# EAGLE board LPC1114 -- Valdez Mutant v.04 (EAGLE 7.0.0)
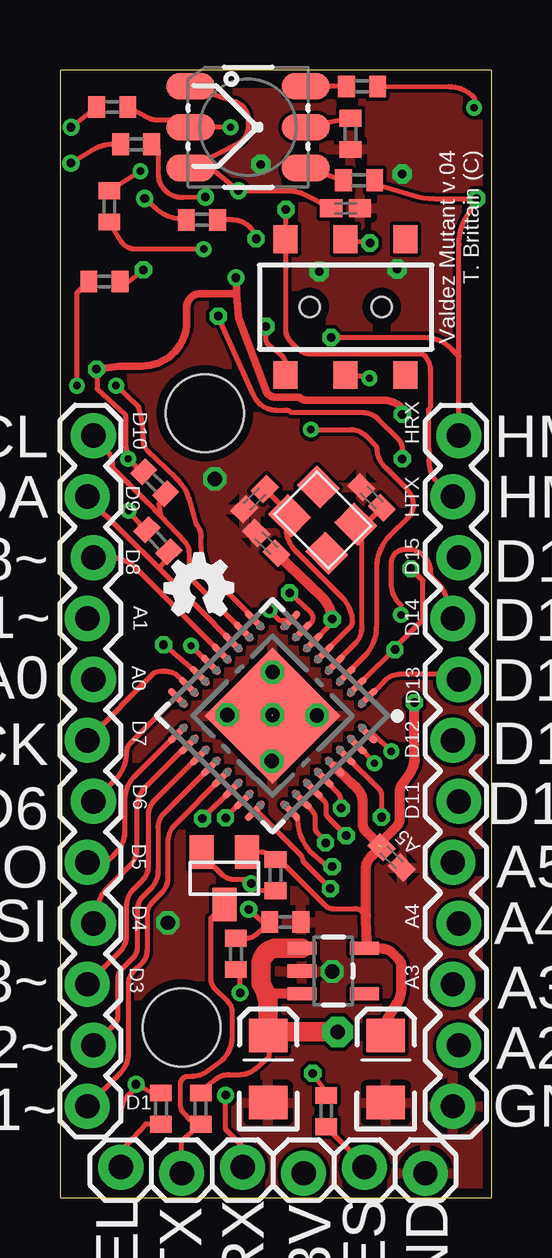
[diagram p0: board, top side]
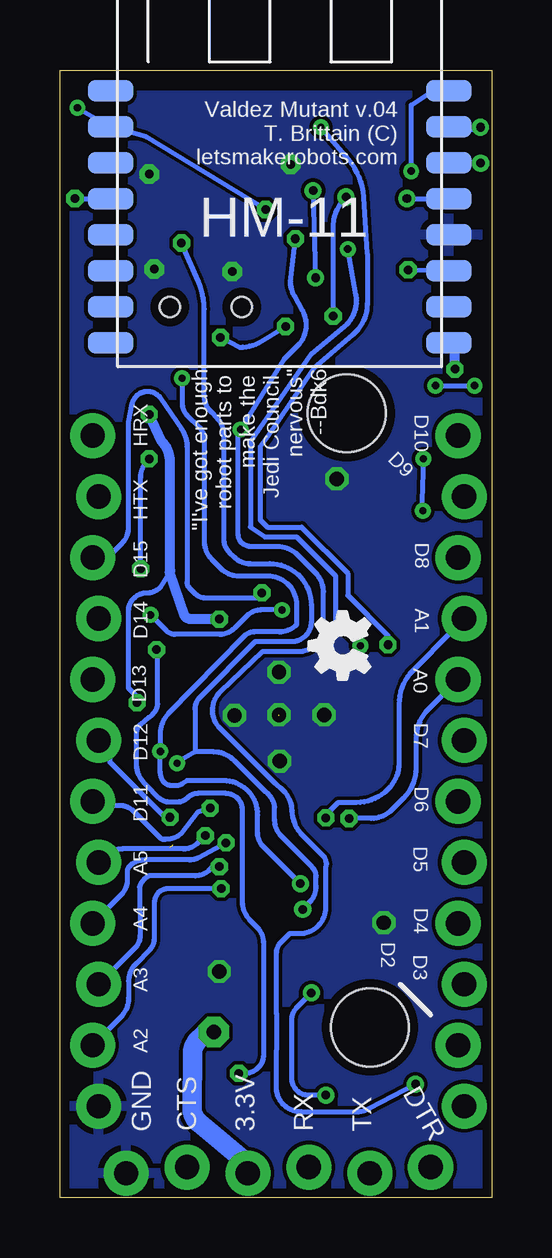
[diagram p1: board, bottom side, seen from below]

Size 18 x 46.97 mm. Coordinates in mm from the lower left corner, seen from the top.
Outline: 0,0 18,0 18,46.97 0,46.97 0,0
Copper layers (1*16): Top 0.0356mm / dielectric 1.5011mm / Bottom 0.0356mm
Design rules "LaenPCBOrder *": minimum track width 6mil, minimum drill 13mil, track to track 6mil, track to pad 6mil, pad to pad 6mil, via to via 6mil, smd to smd 6mil, copper to edge 15mil, drill to drill 6mil, minimum pad ring 7mil, minimum via ring 7mil, stop-mask expansion 3mil, vias tented up to drill 14mil, thermal gap 10mil
Holes 3.25 mm at 5.07,7.1 6.04,32.68

## Footprints (pad centres in the part's own frame; a part is rotated, then mirrored left to right if it is on the bottom)
CRYSTAL_SMD_3.2X2.5 = smd 1.4 x 1.2: 1 0.6,0.5; 2 2.8,0.5; 3 2.8,2.2; 4 0.6,2.2
SOT23-5 = smd 0.55 x 1.2: 1 -0.95,-1.3; 2 0,-1.3; 3 0.95,-1.3; 4 0.95,1.3; 5 -0.95,1.3
EIA3216 = smd 1.4 x 1.6: A 1.4,0; C -1.4,0
C0402K = smd 0.925 x 0.74: 1 -0.6,0; 2 0.6,0
1X12_LOCK = drill 1.016 pad 1.88: 1 0,0.127; 2 2.54,-0.127; 3 5.08,0.127; 4 7.62,-0.127; 5 10.16,0.127; 6 12.7,-0.127; 7 15.24,0.127; 8 17.78,-0.127; 9 20.32,0.127; 10 22.86,-0.127; 11 25.4,0.127; 12 27.94,-0.127
1X06_LOCK = drill 1.016 pad 1.88: 1 0,0; 2 2.54,-0.254; 3 5.08,0; 4 7.62,-0.254; 5 10.16,0; 6 12.7,-0.254
AYZ0202 = smd 1 x 1.15: 1 -2.5,2.825; 2 0,2.825; 3 2.5,2.825; 4 -2.5,-2.825; 5 0,-2.825; 6 2.5,-2.825 | hole 0.85: 1.5,0; -1.5,0
LED-TRICOLOR-5050 = smd 2 x 1.1: 1 -2.4,1.7; 2 -2.4,0; 3 -2.4,-1.7; 4 2.4,-1.7; 5 2.4,0; 6 2.4,1.7
SOT23 = smd 1 x 1.4: 1 -0.95,-1.1; 2 0.95,-1.1; 3 0,1.1
R0402 = smd 0.7 x 0.9: 1 -0.65,0; 2 0.65,0
HVQFN33-7X7 = smd 1.067 x 0.3: P$1 -3.327,2.275; P$2 -3.327,1.625; P$3 -3.327,0.975; P$4 -3.327,0.325; P$5 -3.327,-0.325; P$6 -3.327,-0.975; P$7 -3.327,-1.625; P$8 -3.327,-2.275; P$17 3.327,-2.275; P$18 3.327,-1.625; P$19 3.327,-0.975; P$20 3.327,-0.325; P$21 3.327,0.325; P$22 3.327,0.975; P$23 3.327,1.625; P$24 3.327,2.275 | smd 0.3 x 1.067: P$9 -2.275,-3.327; P$10 -1.625,-3.327; P$11 -0.975,-3.327; P$12 -0.325,-3.327; P$13 0.325,-3.327; P$14 0.975,-3.327; P$15 1.625,-3.327; P$16 2.275,-3.327; P$25 2.275,3.327; P$26 1.625,3.327; P$27 0.975,3.327; P$28 0.325,3.327; P$29 -0.325,3.327; P$30 -0.975,3.327; P$31 -1.625,3.327; P$32 -2.275,3.327 | smd 4 x 4: P$33 0,0
HM-11 = smd 1.9 x 0.9: 1 -0.3,11.5; 2 -0.3,10; 3 -0.3,8.5; 4 -0.3,7; 5 -0.3,5.5; 6 -0.3,4; 7 -0.3,2.5; 8 -0.3,1; 9 13.8,1; 10 13.8,2.5; 11 13.8,4; 12 13.8,5.5; 13 13.8,7; 14 13.8,8.5; 15 13.8,10; 16 13.8,11.5

## Placement (x,y rotation side)
12.5MHZ  CRYSTAL_SMD_3.2X2.5  [CRYSTAL_SMD_3.2X2.5]  8.8,28.48 315 top
AP2112K-3.3TRG1  V_REG_LDOSMD  [SOT23-5]  11.4,9.44 270 top
C1  10uF  [EIA3216]  8.69,5.36 90 top
C2  22pF  [C0402K]  8.12,29.1 45 top
C3  22pF  [C0402K]  13,29.17 315 top
C4  10uF  [EIA3216]  13.59,5.36 90 top
C5  1uF  [C0402K]  13.84,14.18 315 top
C6  1uF  [C0402K]  8.61,27.27 135 top
C7  1uF  [C0402K]  11.91,41.22 0 top
JP1  M12LOCK  [1X12_LOCK]  1.27,3.81 90 top
JP2  M12LOCK  [1X12_LOCK]  16.51,3.81 90 top
JP3  [1X06_LOCK]  2.54,1.27 0 top
JS202011SCQN  DPDT  [AYZ0202]  11.91,37.11 0 top
LED1  LED-TRICOLOR-5050NO_IC  [LED-TRICOLOR-5050]  7.85,44.6 0 top
Q2  BSS138  [SOT23]  6.86,13.31 180 top
R1  330  [R0402]  11.1,3.61 90 top
R2  1k  [R0402]  1.85,38.18 180 top
R3  10k  [R0402]  5.87,3.71 90 top
R4  10k  [R0402]  8.99,13.44 90 top
R5  20k  [R0402]  9.4,11.48 0 top
R6  10k  [R0402]  7.34,10.16 90 top
R7  470  [R0402]  12.12,44.32 90 top
R8  470  [R0402]  12.6,46.3 180 top
R9  470  [R0402]  12.47,42.39 180 top
R10  4.7K  [R0402]  3.95,29.79 315 top
R11  4.7K  [R0402]  4.08,27.37 315 top
R12  330  [R0402]  3.17,43.89 180 top
R13  330  [R0402]  5.92,40.74 180 top
R14  330  [R0402]  2.18,45.44 180 top
R15  330  [R0402]  2.06,41.3 90 top
R16  330  [R0402]  4.22,3.71 90 top
U1  [HVQFN33-7X7]  8.87,20.08 225 top
U$1  HM-11  [HM-11]  15.59,34.62 0 bottom
U$2  [OSHW_FILLX100_NOTEXT]  4.38,24.28 0 top
U$3  [OSHW_FILLX100_NOTEXT]  5.08,21.59 90 bottom

## Library data of the parts
12.5MHZ = LPC1114
AP2112K-3.3TRG1 = SparkFun-PowerIC
C1 C4 = SparkFun-Capacitors
C2 C3 C5-C7 R1-R16 = resistor
JP1-JP3 = SparkFun-Connectors
JS202011SCQN = SparkFun-Electromechanical; PROD_ID: SWCH-08179
LED1 = SparkFun-LED
Q2 = SparkFun-DiscreteSemi; PROD_ID: TRANS-00830
U1 = microbuilder; DIGIKEY#: 568-4948-ND; MANF: NXP; MANF#: LPC1114FHN33/301,5
U$1 = HM-11
U$2 U$3 = ohw-logo

## Nets
3.3V: AP2112K-3.3TRG1.5 C4.A C5.1 C6.1 C7.1 LED1.1 LED1.3 Q2.1 R4.2 R10.1 R11.1 U1.P$6 U1.P$29 U$1.9
5V: AP2112K-3.3TRG1.1 AP2112K-3.3TRG1.3 C1.A JP3.4 R3.2
BUTTON?: R15.2 U$1.16
CONN: R14.2 U$1.15
GND: AP2112K-3.3TRG1.2 C1.C C2.1 C3.1 C4.C C5.2 C6.2 C7.2 JP2.1 JP3.6 R5.2 R7.1 U1.P$33 U$1.12
HM-RX: JP2.12 JS202011SCQN.4 R9.1 U$1.4
HM-TX: JP2.11 JS202011SCQN.1 R8.1 U$1.2
HM_BUTTON?: R15.1 U1.P$13
HM_CONN: LED1.2 R14.1 U1.P$14
IO20: JP2.8 U1.P$1
IO_00_RES: R1.2 R12.1 U1.P$2
IO_02: JP2.9 U1.P$8
IO_03: R2.2 U1.P$9
IO_05-SDA: JP1.11 R11.2 U1.P$11
IO_06: JP1.7 U1.P$15
IO_07: JP1.6 U1.P$16
IO_08: JP1.5 U1.P$17
IO_08-SCL: JP1.12 R10.2 U1.P$10
IO_09: JP1.4 U1.P$18
IO_10: JP1.8 U1.P$22
IO_010: JP1.3 U1.P$19
IO_11: JP1.9 U1.P$23
IO_011: JP1.1 U1.P$21
IO_12: JP2.2 U1.P$24
IO_13: JP2.3 U1.P$25
IO_14: JP2.4 U1.P$26
IO_15: JP2.7 U1.P$30
IO_18: JP2.10 U1.P$7
IO_19: JP1.10 U1.P$12
IO_32: JP2.6 U1.P$28
IO_110: JP1.2 U1.P$20
IO_111: JP2.5 U1.P$27
LPC_RES: R12.2 U$1.14
LPC_SEL: R13.1 R16.2 U1.P$3
LPC_SEL_BOOT: R13.2 U$1.13
N$2: LED1.4 R9.2
N$3: LED1.6 R8.2
N$4: LED1.5 R7.2
N$9: R2.1 U$1.11
N$31: 12.5MHZ.3 C3.2 U1.P$4
N$32: 12.5MHZ.1 C2.2 U1.P$5
RESET: JP3.5 R1.1
RX: JS202011SCQN.2 R5.1 R6.2 U1.P$31
RX-5V: JP3.3 R6.1
SEL: JP3.1 R16.1
TX: JS202011SCQN.5 Q2.2 R4.1 U1.P$32
TX-5V: JP3.2 Q2.3 R3.1

## Tracks (layer width: path | path; a pad name or v marks a point on that pad's centre or on a via)
3.3V  (via drill 0.3 pad 0.3, 0.36, 0.36 pad 0.25)  (1 unrouted)
  Top 0.203: AP2112K-3.3TRG1.5 | 11.35,23.94 U1.P$6 | Q2.1 8.33,14.41 arc-45 8.91,14.17 R4.2 9.15,14.09 11.08,12.16 arc45 11.37,12.04 12.3,12.04 arc-45 12.62,11.9 12.77,11.76 | v7.34,38.33 7.34,38.32 7.36,38.3 | C6.1 8.66,26.85 | R11.1 3.63,27.73 v2.86,28.62 | v1.52,34.52 1.55,33.71 2.74,32.61 2.74,31.29 v2.85,30.79 3.05,30.58 3.35,30.29 R10.1 | LED1.1 7.3,45.67 arc-71 7.85,44.91 7.85,44.64 arc-63 7.41,43.91 5.95,43.16 | 5.95,43.16 LED1.3 | 5.95,43.16 v7.44,41.96 9.52,41.96 arc-27 10.18,41.8 C7.1
  Top 0.305: 7.37,37.67 7.45,36.67 8.64,33.52 8.68,33.48 arc45 9,33.35 9.98,33.35 arc45 10.28,33.22 13.54,33.22 arc-45 14.19,32.95 14.28,32.87 v14.28,32.64 | 7.37,37.67 5.87,37.67 arc0 5.86,37.67 arc90 5.28,37.09 5.28,36.51 arc-90 3.42,34.65 2.46,34.65 v1.52,34.52 | 7.37,37.67 7.36,38.3
  Top 0.406: U1.P$29 12.14,17.3 12.38,17.05 arc-45 12.62,16.48 12.62,15.6 arc45 12.77,15.24 C5.1 13.01,14.25 12.98,14.22 arc45 12.75,13.68 12.77,11.76 12.78,10.95 12.78,10.47 AP2112K-3.3TRG1.5 12.73,10.36 13.48,10.36 arc-45 13.84,10.22 14.11,9.95 arc-45 14.25,9.61 14.25,8.75 arc-31 14.07,8.12 13.61,7.37 C4.A | v14.78,20.62 14.78,18.45 arc-45 14.58,17.65 14.34,17.31 arc45 14.17,16.91 14.17,15.78 arc-45 14.04,15.47 13.28,14.71 | 11.35,23.94 v11.35,24.11 11.3,24.4 11.26,24.5 arc25 10.92,25.03 C6.1
  Bottom 0.203: 7.34,38.36 v7.34,38.33 v7.44,41.96 | v2.85,30.79 2.94,28.45 v2.86,28.62 | v14.78,20.62 14.78,20.88 15.14,21.23 15.14,24.44 arc90 14.38,25.2 arc-45 13.81,25.43 13.42,26.04
  Bottom 0.406: v14.28,32.64 13.76,31.52 arc45 13.41,30.67 13.4,26.13 arc-24 13.42,26.04 12.8,24.23 arc-45 12.5,24.11 v11.35,24.11 11.23,23.98 | v1.52,34.52 1.52,35.36 U$1.9
5V  (via drill 0.6 pad 1.27)
  Top 0.203: AP2112K-3.3TRG1.3 | 8.84,6.91 C1.A 8.74,6.71 8.74,5.89 8.13,5.36 arc-41 7.53,5.13 7.05,5.13 arc37 6.53,4.96 5.93,4.51 R3.2
  Top 0.406: 8.59,8.51 9.68,8.51 AP2112K-3.3TRG1.3
  Top 0.813: 8.77,6.68 C1.A 8.69,8.1 arc17 8.66,8.25 8.59,8.51 8.38,8.94 8.38,9.68 arc-45 8.6,10.2 arc-45 9.06,10.39 AP2112K-3.3TRG1.1 | v11.58,6.91 8.84,6.91
  Bottom 0.813: JP3.4 10.16,1.42 12.18,3.09 arc51 12.49,3.76 12.47,5.97 arc45 12.2,6.62 11.91,6.91 v11.58,6.91
BUTTON?  (via drill 0.3)
  Top 0.203: R15.2 v3.35,42.77
  Bottom 0.203: U$1.16 1.69,46.02 1.22,46.02 1.52,46.13 2.44,46.13 3.35,45.52 v3.35,42.77
CONN  (via drill 0.36)
  Top 0.203: R14.2 v0.46,44.6
  Bottom 0.203: v0.46,44.6 0.66,44.5 0.89,44.48 1.64,44.48 U$1.15
GND  (via drill 0.36 pad 0.81, 0.6 pad 0.81)  (1 unrouted)
  other vias: 8.86,20.12 8.86,21.89 10.72,20.09 8.84,18.19 6.99,20.12 11.35,9.42 4.5,11.46 6.45,29.95 10.82,38.58 14.07,38.68 14.27,42.65 8.38,43.05
  pour Bottom: 0.1,45.92 0,0 17.78,0 17.88,45.92
  pour Top: 0.1,46.02 0,0 17.78,0 17.98,46.02
HM-RX  (via drill 0.36, 0.36 pad 0.25)
  Top 0.203: JS202011SCQN.4 9.41,34.72 arc52 9.22,35.11 8.72,35.51 arc-18 8.66,35.57 8.66,35.57 arc-34 8.59,35.82 v8.59,36.3 | JP2.12 16.64,35.05 | 16.64,35.05 16.64,39.73 arc-29 16.91,40.8 v17.37,41.63 15.59,41.63 arc-17 14.72,41.76 13.12,42.25 R9.1 | v11.3,35.84 15.22,35.84 arc-45 16.3,35.39 16.64,35.05
  Bottom 0.203: v17.37,41.63 15.88,41.63 U$1.4 | v11.3,35.84 10.5,35.43 arc-25 9.7,35.61 v8.59,36.3
HM-TX  (via drill 0.3, 0.36 pad 0.25)
  Top 0.203: JP2.11 15.87,29.66 arc-48 15.38,30.7 15.37,31.76 15.37,32.84 15.44,32.92 15.44,34.47 arc45 15.18,35.12 arc45 15.08,35.15 10.46,35.15 arc-45 9.91,35.38 9.64,35.65 arc-45 9.42,36.17 9.42,39.92 JS202011SCQN.1 | JS202011SCQN.1 9.65,39.93 | R8.1 16.21,46.3 arc-45 17.26,45.86 17.27,45.85 v17.27,45.41 | JS202011SCQN.1 v9.42,41.17
  Bottom 0.203: v9.42,41.17 14.4,44.2 U$1.2 | 15.79,44.53 U$1.2 | v17.27,45.41 U$1.2
HM_BUTTON?  (via drill 0.3)
  Top 0.203: U1.P$13 6.26,22.2 v5.47,23 | v5.99,39.52 3.15,39.52 arc-59 2.53,39.87 R15.1
  Bottom 0.203: 5.47,23.08 v5.47,23 6.5,23.98 6.5,25.91 8.13,27.53 9.45,27.53 10.06,27.94 10.06,31.5 7.52,35.15 6.13,36.3 arc-61 5.65,37.61 v5.99,39.52
HM_CONN  (via drill 0.3, 0.36 pad 0.25)
  Top 0.203: U1.P$14 5.83,21.76 v4.32,23.04 | R14.1 3.71,44.98 arc27 4.03,44.91 4.53,44.91 LED1.2 v7.11,44.6
  Bottom 0.203: v4.32,23.04 4.32,23.42 5.99,25.09 5.99,26.01 7.92,27.94 9.35,27.94 9.65,28.25 9.65,31.29 9.35,31.7 7.42,34.54 5.78,35.96 arc-49 5.18,37.26 5.18,39.34 5.33,41.69 arc-37 5.96,43.24 v7.11,44.6
IO20
  Top 0.203: U1.P$1 13.53,21.53 arc-45 14.23,21.82 16.41,21.82 JP2.8
IO_00_RES  (via drill 0.36, 0.36 pad 0.25)
  Top 0.203: 14.22,30.89 v14.28,30.79 14.28,31.18 arc45 14.09,31.64 13.28,32.44 arc45 12.62,32.72 9.65,32.72 arc45 9.41,32.82 9,32.82 arc-67 8.08,33.43 8.05,33.49 7.84,33.94 v6.6,36.73 | v10.54,5.18 11.1,4.42 R1.2 | v6.07,41.69 5.12,41.67 arc-57 4.26,42.11 arc-34 4.11,42.6 4.11,43.66 3.88,43.89 R12.1 | U1.P$2 13.11,22.02 v13.97,22.84 13.97,22.91 15.14,24.08 15.14,25.7 v14.63,26.21
  Bottom 0.203: v13.97,22.84 13.92,22.78 13.92,20.56 arc52 14.29,20.01 14.63,19.72 arc-52 14.81,19.36 14.81,18.04 arc-45 14.41,17.2 13.86,16.65 arc-45 13.46,16.48 13.09,16.48 arc-41 12.72,16.62 12.64,16.69 arc41 12.25,16.84 11.09,16.84 arc49 10.56,16.6 arc41 10.39,16.15 10.39,12.32 arc-45 10.08,11.58 9.8,11.3 arc45 9.5,10.58 9.5,5.94 arc54 9.81,5.34 arc36 10.31,5.18 v10.54,5.18 | v14.63,26.21 14.63,30.01 arc49 v14.28,30.79 | v6.6,36.73 6.6,40.41 arc45 v6.07,41.69
IO_02  (via drill 0.3)
  Top 0.203: U1.P$8 9.18,24.04 v8.74,24.49 | v14.22,24.28 14.22,24.69 14.18,24.74 arc-45 13.82,25.6 13.82,26.42 arc-90 14.43,27.03 14.51,27.03 arc-90 15.44,26.09 arc45 15.57,25.78 15.79,25.56 arc-45 16.15,24.69 16.15,24.68 arc45 JP2.9
  Bottom 0.203: v8.74,24.49 9.63,24.49 arc-45 10.19,24.25 10.72,23.73 arc45 11.34,23.47 13.2,23.47 arc45 13.56,23.62 v14.22,24.28
IO_03  (via drill 0.3)
  Top 0.203: 8.11,24.04 U1.P$9 8.13,24.08 6.46,25.75 arc-45 5.89,27.12 5.89,27.55 arc45 5.69,28.04 5.45,28.96 arc32 4.83,30 3.65,31.12 arc-47 3.48,31.69 arc18 3.28,32.94 v2.34,33.83 | v0.71,33.83 0.71,37.69 R2.2
  Bottom 0.203: v2.34,33.83 v0.71,33.83
IO_05-SDA
  Top 0.203: JP1.11 1.14,29.19 4.11,26.24 | 4.11,26.24 U1.P$11 | R11.2 4.54,26.67 4.11,26.24
IO_06
  Top 0.203: U1.P$15 5.31,21.36 4.83,21.81 arc45 3.94,21.87 JP1.7
IO_07
  Top 0.203: U1.P$16 4.82,20.82 2.94,18.94 arc45 2.77,18.53 arc-45 2.31,17.42 JP1.6
IO_08
  Top 0.203: U1.P$17 4.88,19.34 3.13,17.58 arc45 2.69,16.52 2.69,15.23 arc-45 2.34,14.38 2.13,14.17 arc-45 1.47,13.89 1.22,13.89 JP1.5
IO_08-SCL
  Top 0.203: 7.67,23.6 U1.P$10 5.38,25.86 5.38,26.89 arc43 5.22,27.3 4.19,28.39 | JP1.12 1.83,31.32 arc-45 2.2,30.41 3.66,28.96 4.19,28.39 | R10.2 4.12,28.93 4.19,28.39
IO_09
  Top 0.203: U1.P$18 5.31,18.88 3.59,17.15 arc45 3.2,16.22 3.2,14.5 arc-45 2.93,13.85 1.93,12.85 arc45 1.57,12 1.57,11.61 JP1.4
IO_10  (via drill 0.36 pad 0.25)
  Top 0.203: U1.P$22 v5.94,15.8
  Bottom 0.203: JP1.8 2.65,20.34 arc-45 3.15,19.13 3.15,17.91 arc45 3.68,16.64 4.17,16.15 arc45 5.02,15.8 v5.94,15.8
IO_010
  Top 0.203: U1.P$19 5.79,18.42 3.96,16.59 arc45 3.68,15.91 3.68,13.83 arc-45 3.42,13.2 3.06,12.84 arc45 2.77,12.14 2.77,10.93 arc-45 2.48,10.22 JP1.3
IO_11  (via drill 0.36 pad 0.25)
  Top 0.203: U1.P$23 7.61,16.58 v6.91,15.82
  Bottom 0.203: JP1.9 1.7,23.57 1.7,23.55 3.27,21.98 arc-45 3.86,20.55 3.86,18.11 arc45 4.31,17.03 4.34,17 arc45 5.64,16.46 6.4,16.46 6.82,16.04 arc-45 v6.91,15.82
IO_011
  Top 0.203: U1.P$21 4.8,15.55 arc45 4.5,14.81 4.5,13.34 arc-45 4.22,12.68 3.87,12.32 arc45 3.63,11.76 3.63,10.3 arc-45 3.4,9.76 3.08,9.43 arc45 2.85,8.87 2.85,6.02 arc-45 2.49,5.15 JP1.1
IO_12  (via drill 0.36 pad 0.25)
  Top 0.203: U1.P$24 8.19,16.12 10.03,14.28 arc-45 10.13,14.02 v11.28,12.88
  Bottom 0.203: v11.28,12.88 13.49,12.88 arc-45 13.88,12.72 arc-45 14.07,12.25 14.07,10.78 arc45 14.26,10.33 14.83,9.75 arc-45 15.14,9.02 15.14,8.32 arc45 15.47,7.51 JP2.2
IO_13  (via drill 0.36 pad 0.25)
  Top 0.203: U1.P$25 9.87,15.81 9.91,15.71 arc40 10.4,14.46 11.15,13.82 v11.35,13.79
  Bottom 0.203: v11.35,13.79 11.43,13.99 11.78,13.64 arc45 12.35,13.41 14.3,13.41 arc-45 14.68,12.95 14.66,10.92 arc46 14.87,10.4 JP2.3
IO_14  (via drill 0.36 pad 0.25)
  Top 0.203: U1.P$26 10.12,16.58 10.54,16.09 arc-41 10.64,15.82 10.64,15.43 arc40 10.73,15.18 v11.07,14.78
  Bottom 0.203: v11.07,14.78 12.22,14.17 arc28 12.6,14.07 14.46,14.07 arc-45 15.1,13.8 arc-45 15.19,13.59 15.19,13.24 arc45 15.45,12.62 JP2.4
IO_15  (via drill 0.36 pad 0.25)
  Top 0.203: U1.P$30 13.31,17.01 arc-45 13.41,16.78 v13.41,15.85
  Bottom 0.203: v13.41,15.85 13.56,15.8 15.92,18.16 arc57 15.93,18.16 arc-57 16.1,18.77 JP2.7
IO_18  (via drill 0.36 pad 0.25)
  Top 0.203: U1.P$7 10.05,23.54 10.45,23.92 arc94 10.45,24.4 v9.58,25.2
  Bottom 0.203: JP2.10 16.3,26.67 arc-45 15.79,26.88 15.41,27.26 arc-45 15.14,27.92 15.14,32.31 14.99,33.07 arc134 13.81,33.31 12.93,32.03 arc35 12.7,31.3 12.7,25.64 arc-45 12.61,25.41 12.37,25.17 arc-45 11.95,24.99 9.78,24.99 v9.58,25.2
IO_19
  Top 0.203: JP1.10 2.07,26.67 arc-45 3.22,26.19 U1.P$12
IO_32  (via drill 0.36 pad 0.25)
  Top 0.203: U1.P$28 10.99,17.48 11.6,16.85 arc-44 11.71,16.58 11.71,16.36 v11.73,16.23
  Bottom 0.203: v11.73,16.23 12.27,16.05 12.95,15.17 arc45 13.58,14.94 arc45 13.8,14.97 14.94,16.11 arc-45 15.48,16.33 16.46,16.33 JP2.6
IO_110
  Top 0.203: U1.P$20 6.28,17.96 4.34,16.03 arc45 4.09,15.41 4.09,13.62 arc-45 3.78,12.88 3.46,12.56 arc45 3.23,11.98 3.23,10.44 arc-45 3.03,9.96 2.58,9.51 arc45 2.41,9.12 2.41,7.56 arc-45 2.27,7.23 JP1.2
IO_111  (via drill 0.36 pad 0.25)
  Top 0.203: U1.P$27 10.53,17.03 11.02,16.54 arc-45 11.1,16.34 11.1,16.01 arc45 11.16,15.87 v11.94,15.09
  Bottom 0.203: v11.94,15.09 12.25,14.78 arc45 12.85,14.53 15.39,14.53 arc-45 16.13,14.22 JP2.5
LPC_RES  (via drill 0.36)
  Top 0.203: R12.2 2.28,43.89 arc32 1.32,43.63 v0.46,43.1
  Bottom 0.203: v0.46,43.1 0.72,43.12 U$1.14
LPC_SEL  (via drill 0.3, 0.36)
  Top 0.203: 2.54,3.5 arc-45 2.87,4.29 3.17,4.6 v3.17,4.72 3.84,4.36 R16.2 | v8.18,39.95 arc77 7.2,40.74 R13.1 | U1.P$3 11.91,21.77 12.7,22.56 arc45 13.21,23.78 13.21,26.27 arc-45 13.74,27.56 14.52,28.34 arc45 14.73,28.85 arc45 14.44,29.55 13.57,30.43 arc-45 13.21,31.29 12.75,31.75 arc45 12.14,32 v10.46,32
  Bottom 0.203: v3.17,4.72 5.08,3.72 arc29 5.62,3.58 7.94,3.58 arc45 8.69,3.89 arc45 8.99,4.61 8.97,7.67 8.97,7.68 8.97,10.19 arc45 8.79,10.63 8.41,11.01 8,11.01 arc-90 6.91,12.1 6.91,13.78 arc-45 6.98,14.19 7.77,14.98 arc45 8.33,16.09 arc-49 8.76,17.04 8.99,17.25 9.02,17.25 11.32,19.55 arc91 11.3,21.1 9.55,22.76 8.05,22.76 arc-90 7.01,23.8 7.01,25.25 arc-45 7.33,26.03 8.07,26.77 arc-45 8.94,27.13 10.01,27.13 arc45 10.44,27.31 10.44,27.31 arc45 10.57,27.61 10.57,32.11 v10.46,32 8.64,34.95 8.07,35.52 arc-45 7.72,36.36 arc-29 7.88,36.96 8.23,37.57 arc29 8.38,38.16 v8.18,39.95
LPC_SEL_BOOT  (via drill 0.36)
  Top 0.203: R13.2 4.89,40.79 arc-34 4.04,41.18 v3.53,41.63
  Bottom 0.203: v3.53,41.63 U$1.13
N$2
  Top 0.203: LED1.4 R9.2
N$3
  Top 0.203: R8.2 LED1.6
N$4
  Top 0.203: R7.2 LED1.5
N$9  (via drill 0.36 pad 0.25)
  Top 0.203: R2.1 2.85,38.17 v3.48,38.66
  Bottom 0.203: v3.48,38.66 1.8,38.63 U$1.11
N$31
  Top 0.203: U1.P$4 11.45,22.22 12.3,23.07 arc45 12.6,23.79 12.6,27.8 12.5MHZ.3 12.73,28.06 C3.2
N$32
  Top 0.203: 10.99,22.68 U1.P$5 12.11,23.78 arc45 12.19,23.97 arc45 11.76,25.02 9.81,26.97 arc-45 9.45,27.84 9.45,28.28 12.5MHZ.1 9.58,28.49 C2.2
RESET
  Top 0.203: JP3.5 12.7,1.36 R1.1
RX  (via drill 0.3, 0.36, 0.36 pad 0.25)
  Top 0.203: R6.2 7.78,10.81 arc42 8.17,10.96 R5.1 8.46,11.48 v7.87,12.01 | U1.P$31 12.57,18.67 12.65,18.59 v13.12,18.1 | JS202011SCQN.2 v12.93,39.78
  Bottom 0.203: v12.93,39.78 12.22,38.16 arc24 11.99,37.03 11.99,33.42 arc-45 11.71,32.74 11.44,32.47 arc45 11.18,31.83 11.18,27.46 arc-45 10.94,26.89 10.75,26.7 arc-45 10.07,26.42 9.25,26.42 arc90 7.52,24.69 7.52,23.98 arc90 8.34,23.16 9.86,23.16 12.17,20.85 arc-45 12.37,20.36 12.37,18.57 | v7.87,12.01 7.61,12.28 arc-45 7.32,12.98 7.32,13.36 arc-45 7.5,13.79 8.77,15.07 arc45 9.04,15.73 9.04,16.28 arc-45 9.41,16.89 10.71,18.2 arc-45 11.59,18.57 12.37,18.57 | 12.37,18.57 13.06,18.16 v13.12,18.1
RX-5V  (via drill 0.36)
  Top 0.203: JP3.3 7.62,2.13 6.91,2.85 v6.91,4.27 | v7.52,8.53 7.52,9.33 R6.1
  Bottom 0.203: v6.91,4.27 7.65,4.27 arc45 8.12,4.46 arc45 8.33,4.97 8.33,7.39 arc45 8.1,7.96 v7.52,8.53
SEL
  Top 0.203: R16.1 3.57,3.06 2.54,1.93 JP3.1
TX  (via drill 0.3, 0.36)
  Top 0.203: Q2.2 5.91,14.31 6.73,13.49 arc45 7.29,13.26 7.8,13.26 v7.98,13.08 8.27,12.79 R4.1 | JS202011SCQN.5 11.96,34.24 12.8,34.24 v12.9,34.14 | U1.P$32 13.07,19.34 v13.82,18.59
  Bottom 0.203: v12.9,34.14 12.9,33.09 arc-45 12.71,32.63 12.18,32.09 arc45 11.99,31.64 11.99,27.37 arc-45 11.67,26.61 11.28,26.21 arc-45 10.54,25.91 9.35,25.91 arc90 8.13,24.69 8.13,23.88 arc45 8.86,23.57 9.89,23.57 arc-46 10.35,23.38 13.48,20.16 arc-44 13.82,19.33 v13.82,18.59 13.82,17.74 arc-27 13.75,17.43 arc-63 13.32,17.17 13.13,17.17 arc-34 12.9,17.24 12.7,17.37 11.18,17.37 arc90 9.75,15.95 9.75,15.2 arc-45 9.52,14.62 v7.98,13.08
TX-5V
  Top 0.203: JP3.2 5.08,2.4 R3.1 5.48,3.21 5.16,3.53 arc-45 5.03,3.84 5.03,4.75 arc-90 5.33,5.05 5.44,5.05 arc37 6.21,5.31 6.68,5.67 arc53 7.19,6.68 7.19,7.75 arc45 7.03,8.13 6.48,8.69 arc-45 6.3,9.12 6.3,11.65 Q2.3

## Text on the board
tNames: Valdez Mutant v.04 / T. Brittain (C) | D10 SCL | D10 | HRX | HM-RX | D9 SDA | D9 | HTX | HM-TX | D8~ | D8 | D15 | D15 | A1~ | A1 | D14 | D14~ | A0 | A0 | D13 | D13 | D7 SCK | D7 | D12 | D12~ | D6 | D6 | D11 | D11 | D5~MISO | D5 | A5 | A5 | D4~MOSI | D4 | A4 | A4~WAKE | D3~ | D3 | A3 | A3~ | D2~ | A2~ | D1~ | D1 | GND | TX | RX | 3.3V | GND | DTR/SEL | CTS/RES
bNames: Valdez Mutant v.04 / T. Brittain (C) / letsmakerobots.com | "I've got enough / robot parts to / make the / Jedi Council / nervous" / --Bdk6 | D10 | HRX | D9 | HTX | D8 | D15 | A1 | D14 | A0 | D13 | D7 | D12 | D6 | D11 | D5 | A5 | D4 | A4 | D2 | D3 | A3 | A2 | DTR | TX | RX | 3.3V | CTS | GND